# Altium PCB Relay PCB.PcbDoc
Units mil, origin at the board's own origin, x right, y up, seen from the top; angles counter-clockwise.
Board outline 5569.4 x 6338.61 mil, 4 copper layers (Top Layer, Signal Layer 1, Signal Layer 2, Bottom Layer), stack 30.635 mil thick; 27 components, 20 nets, 111 pads, 0 vias.
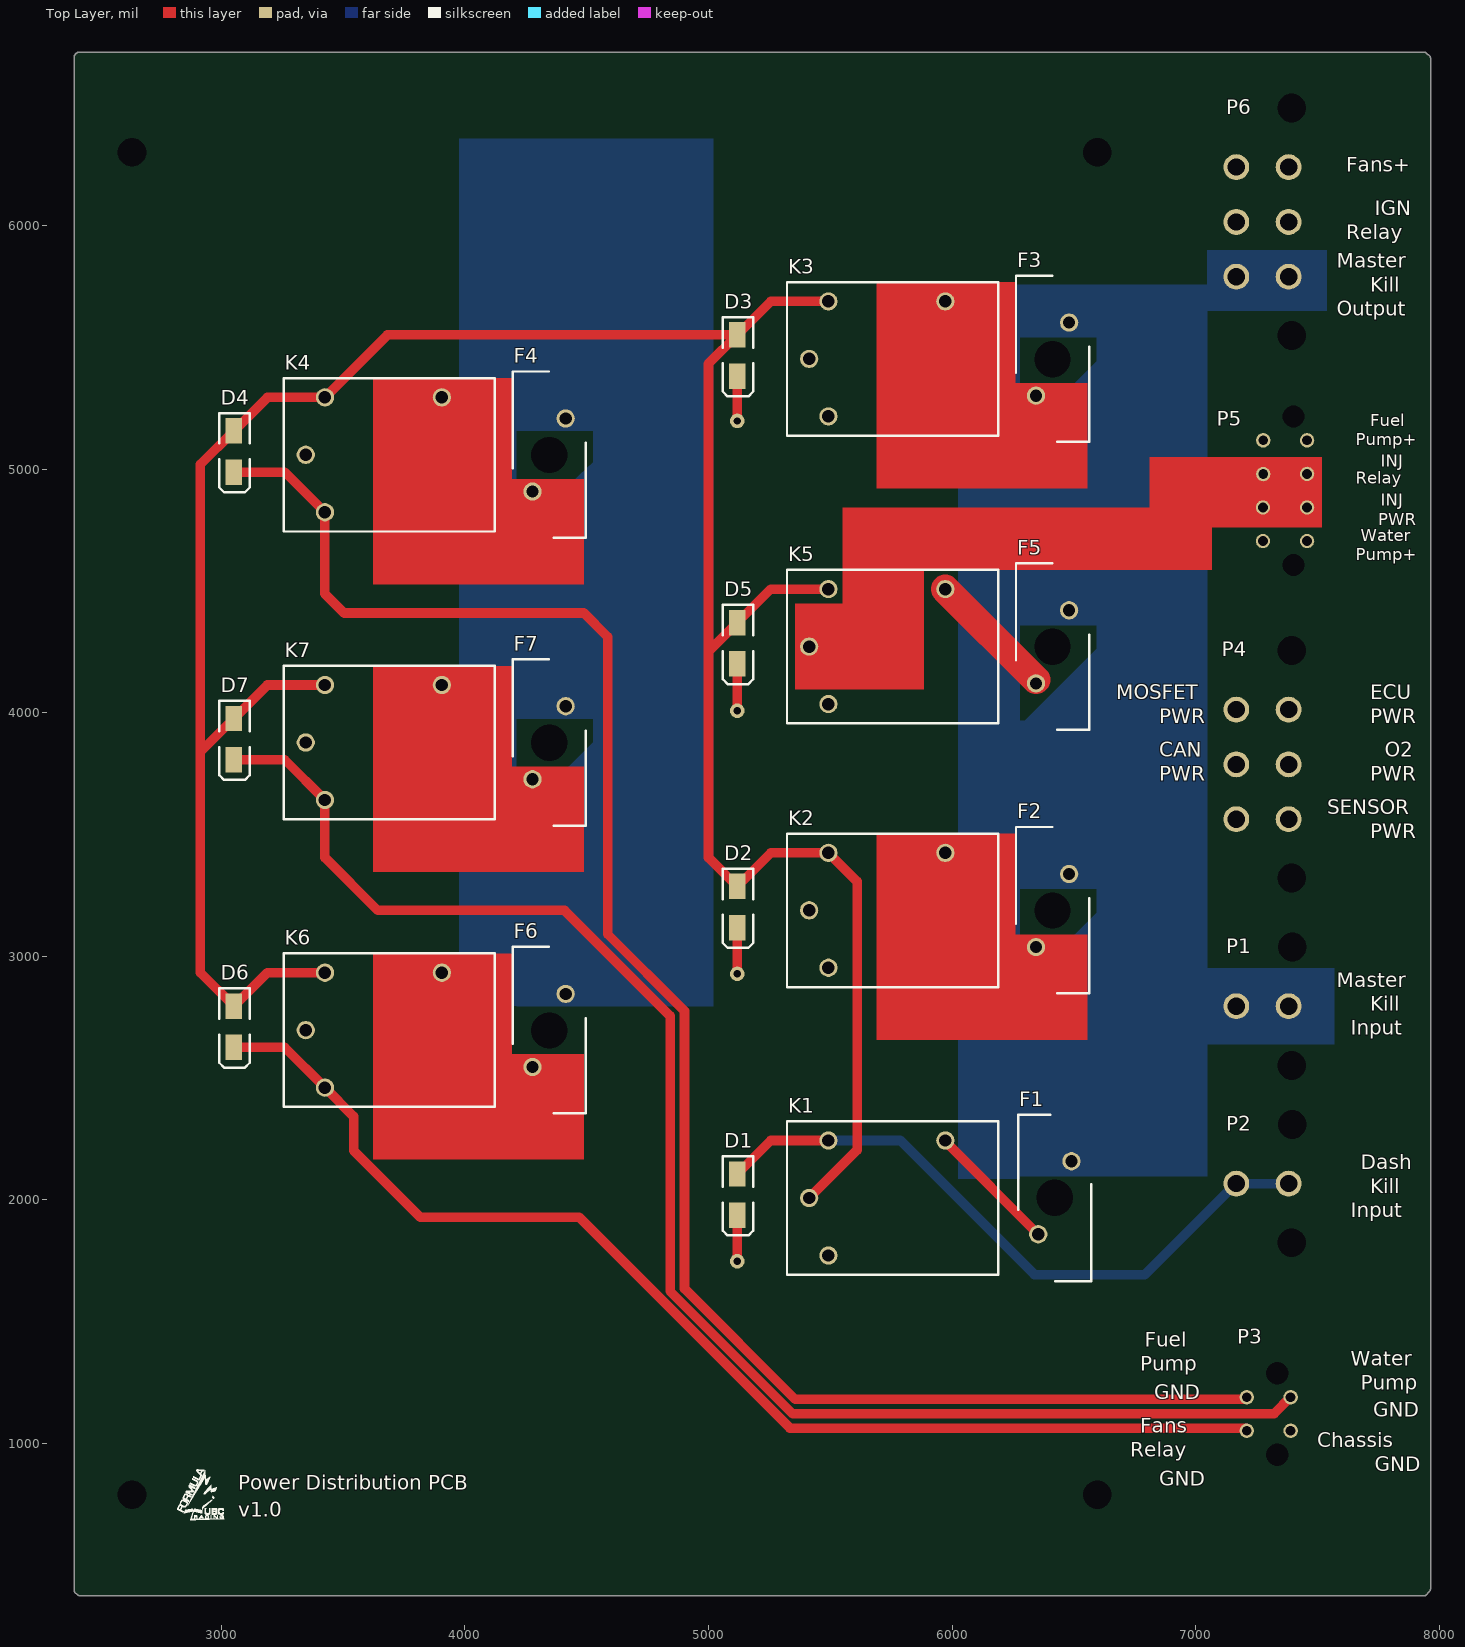
[diagram p0: Top Layer view]
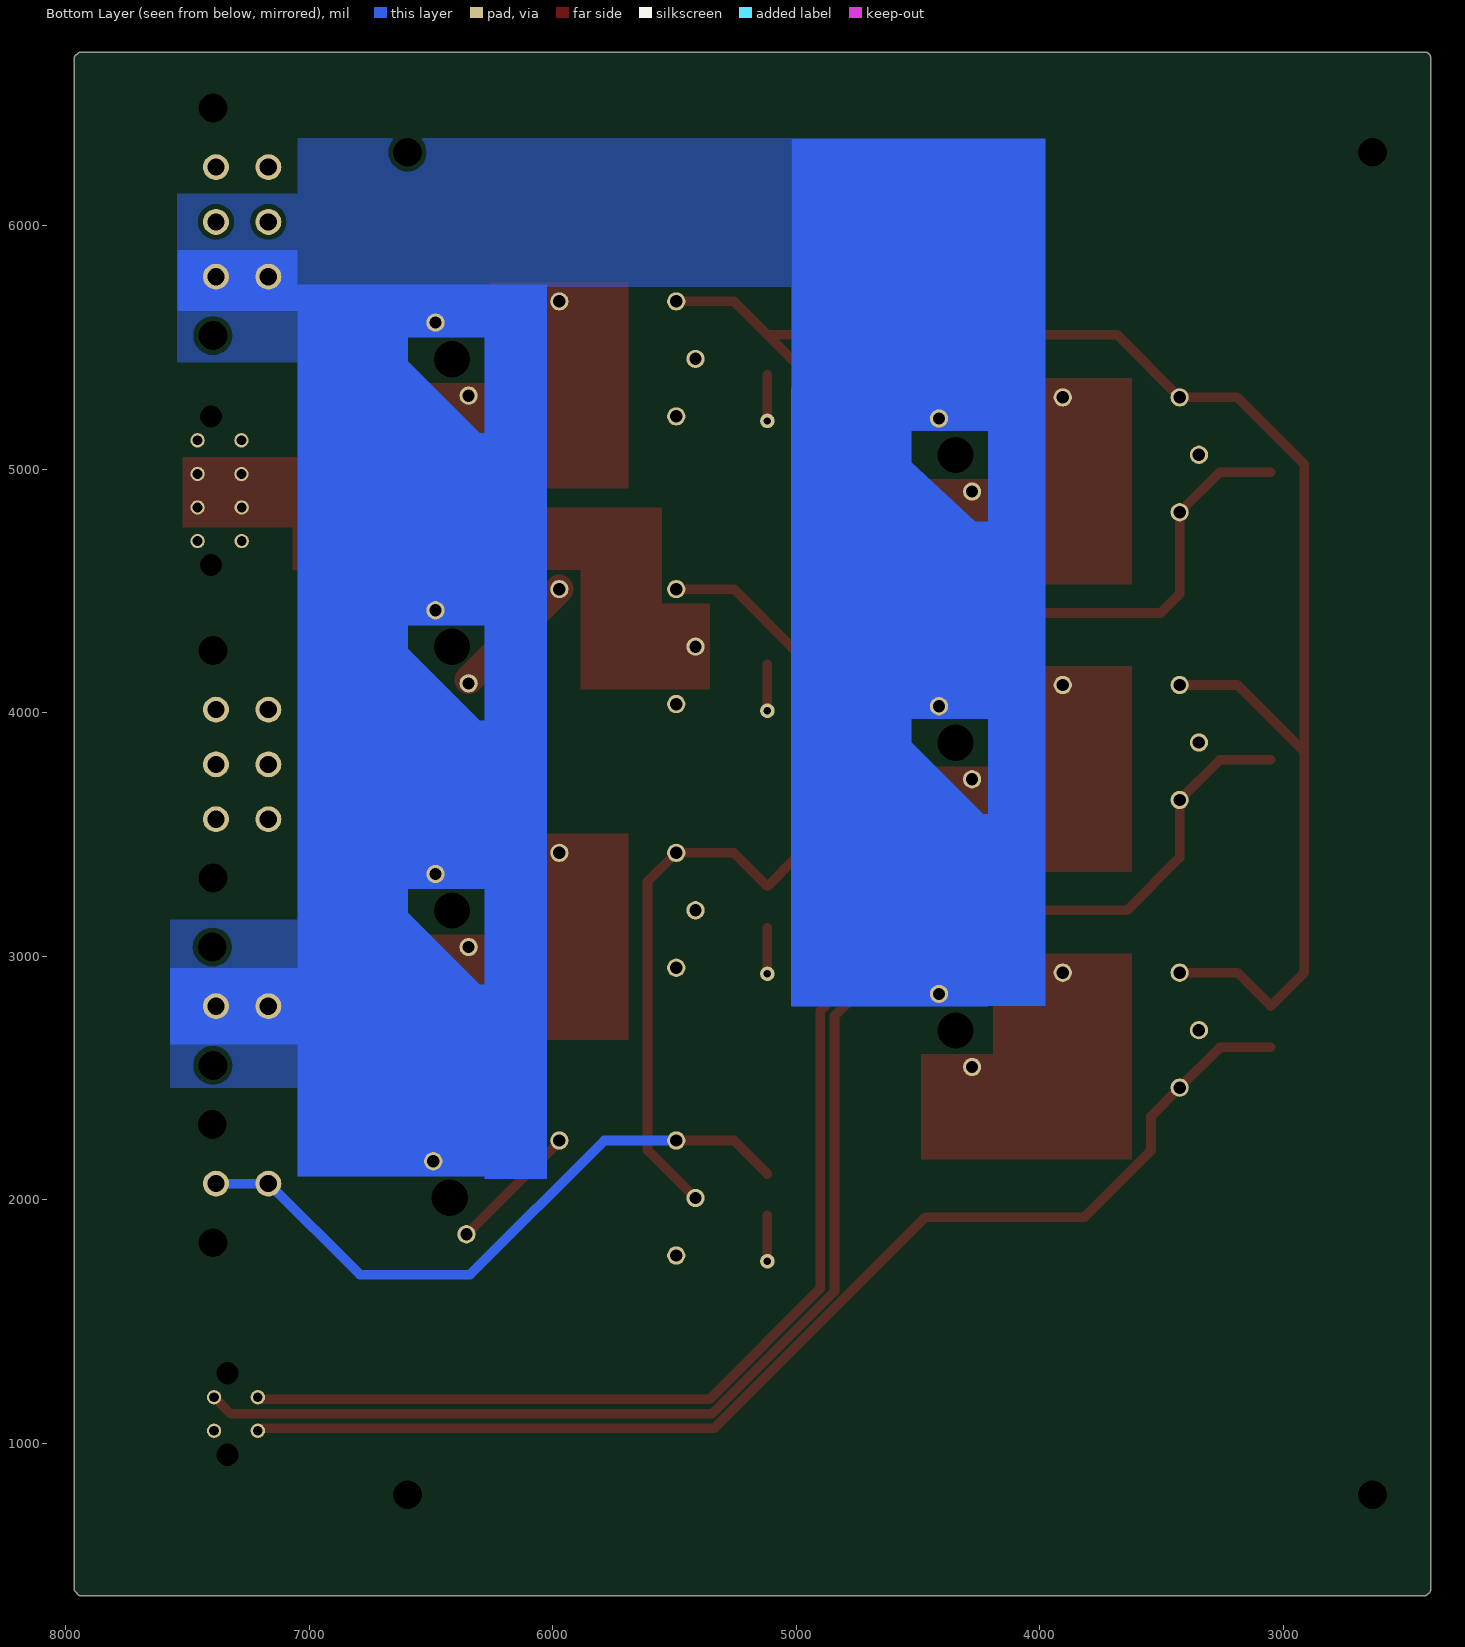
[diagram p1: Bottom Layer view, seen from below]
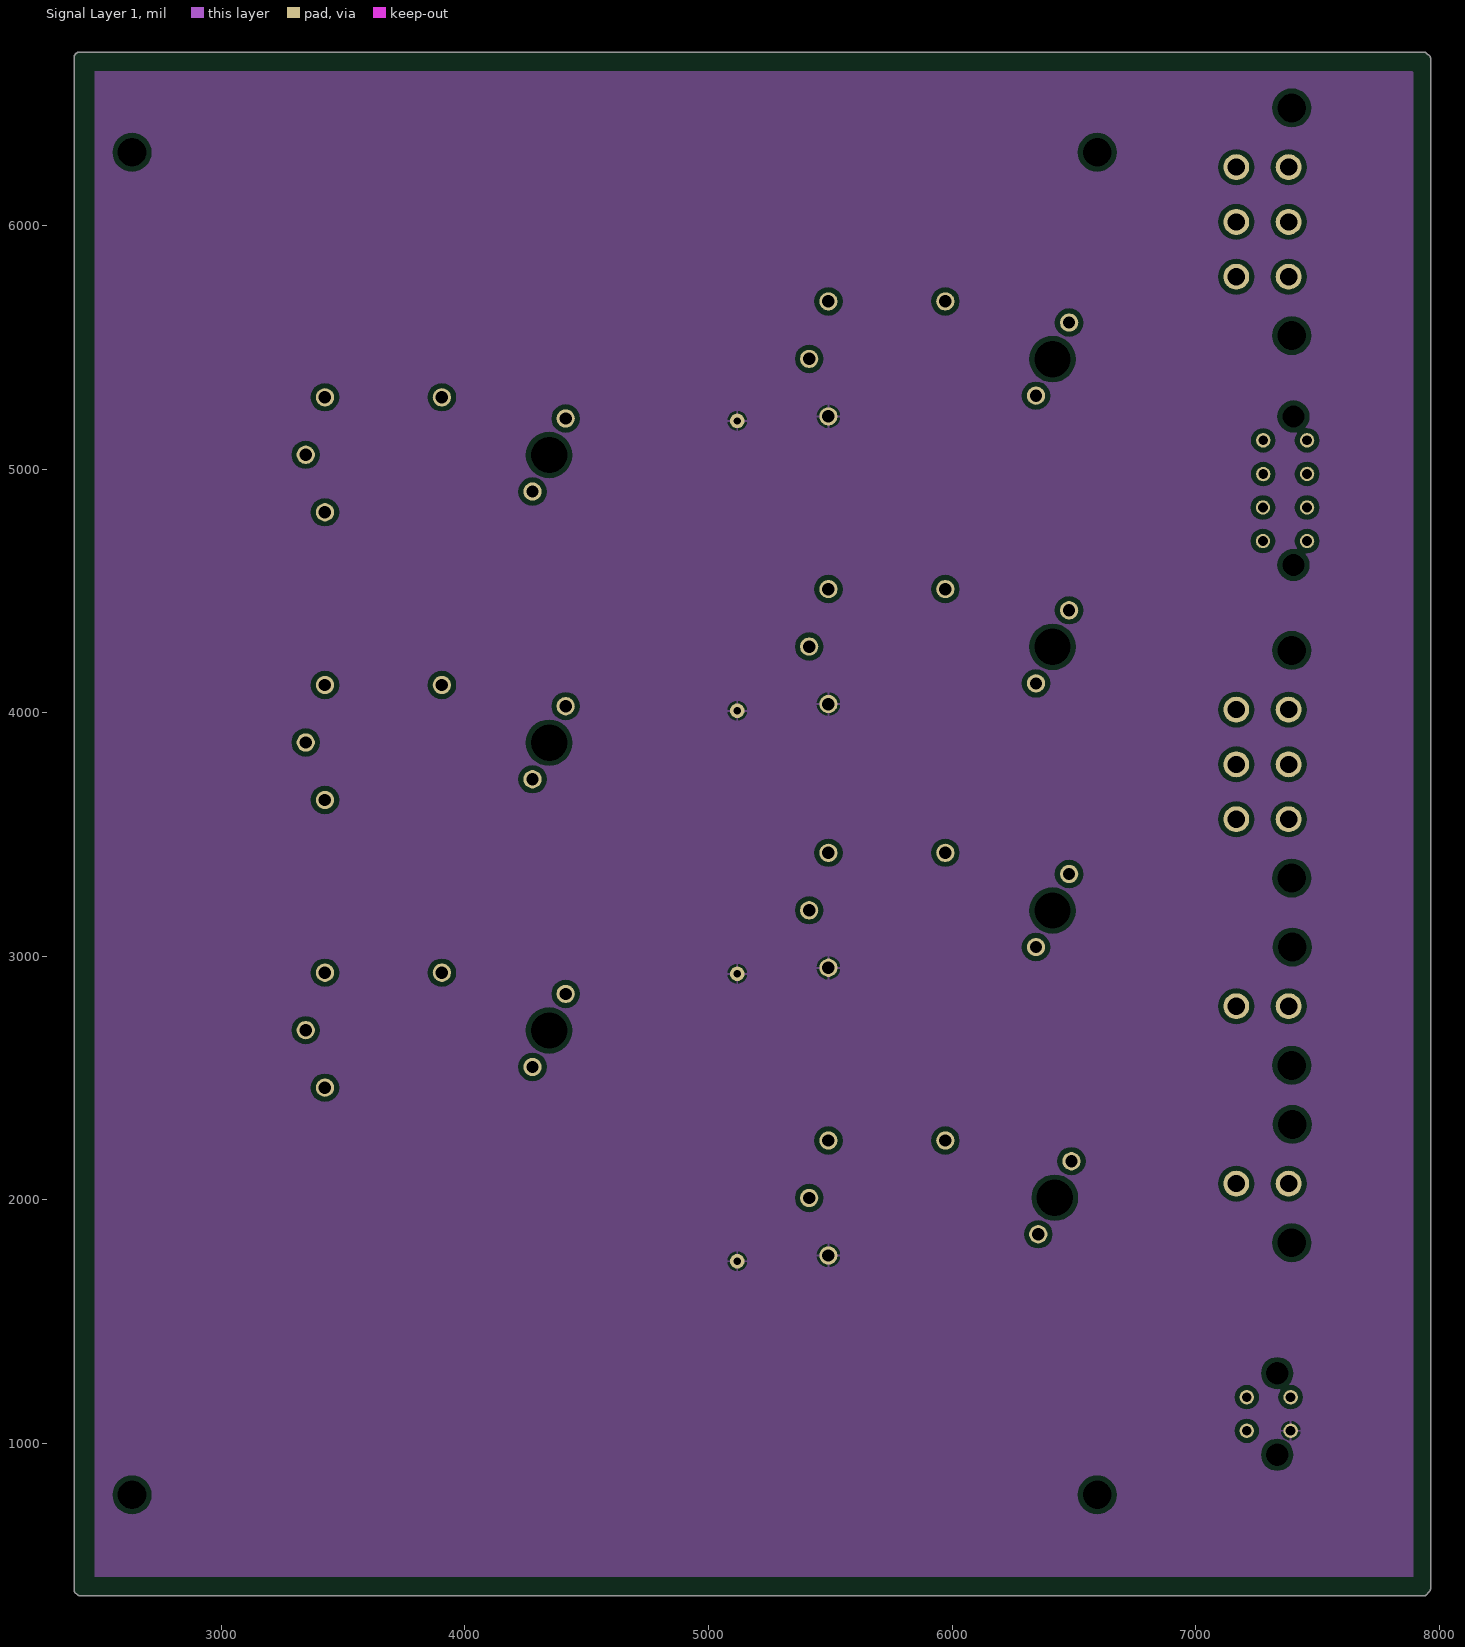
[diagram p2: Signal Layer 1]
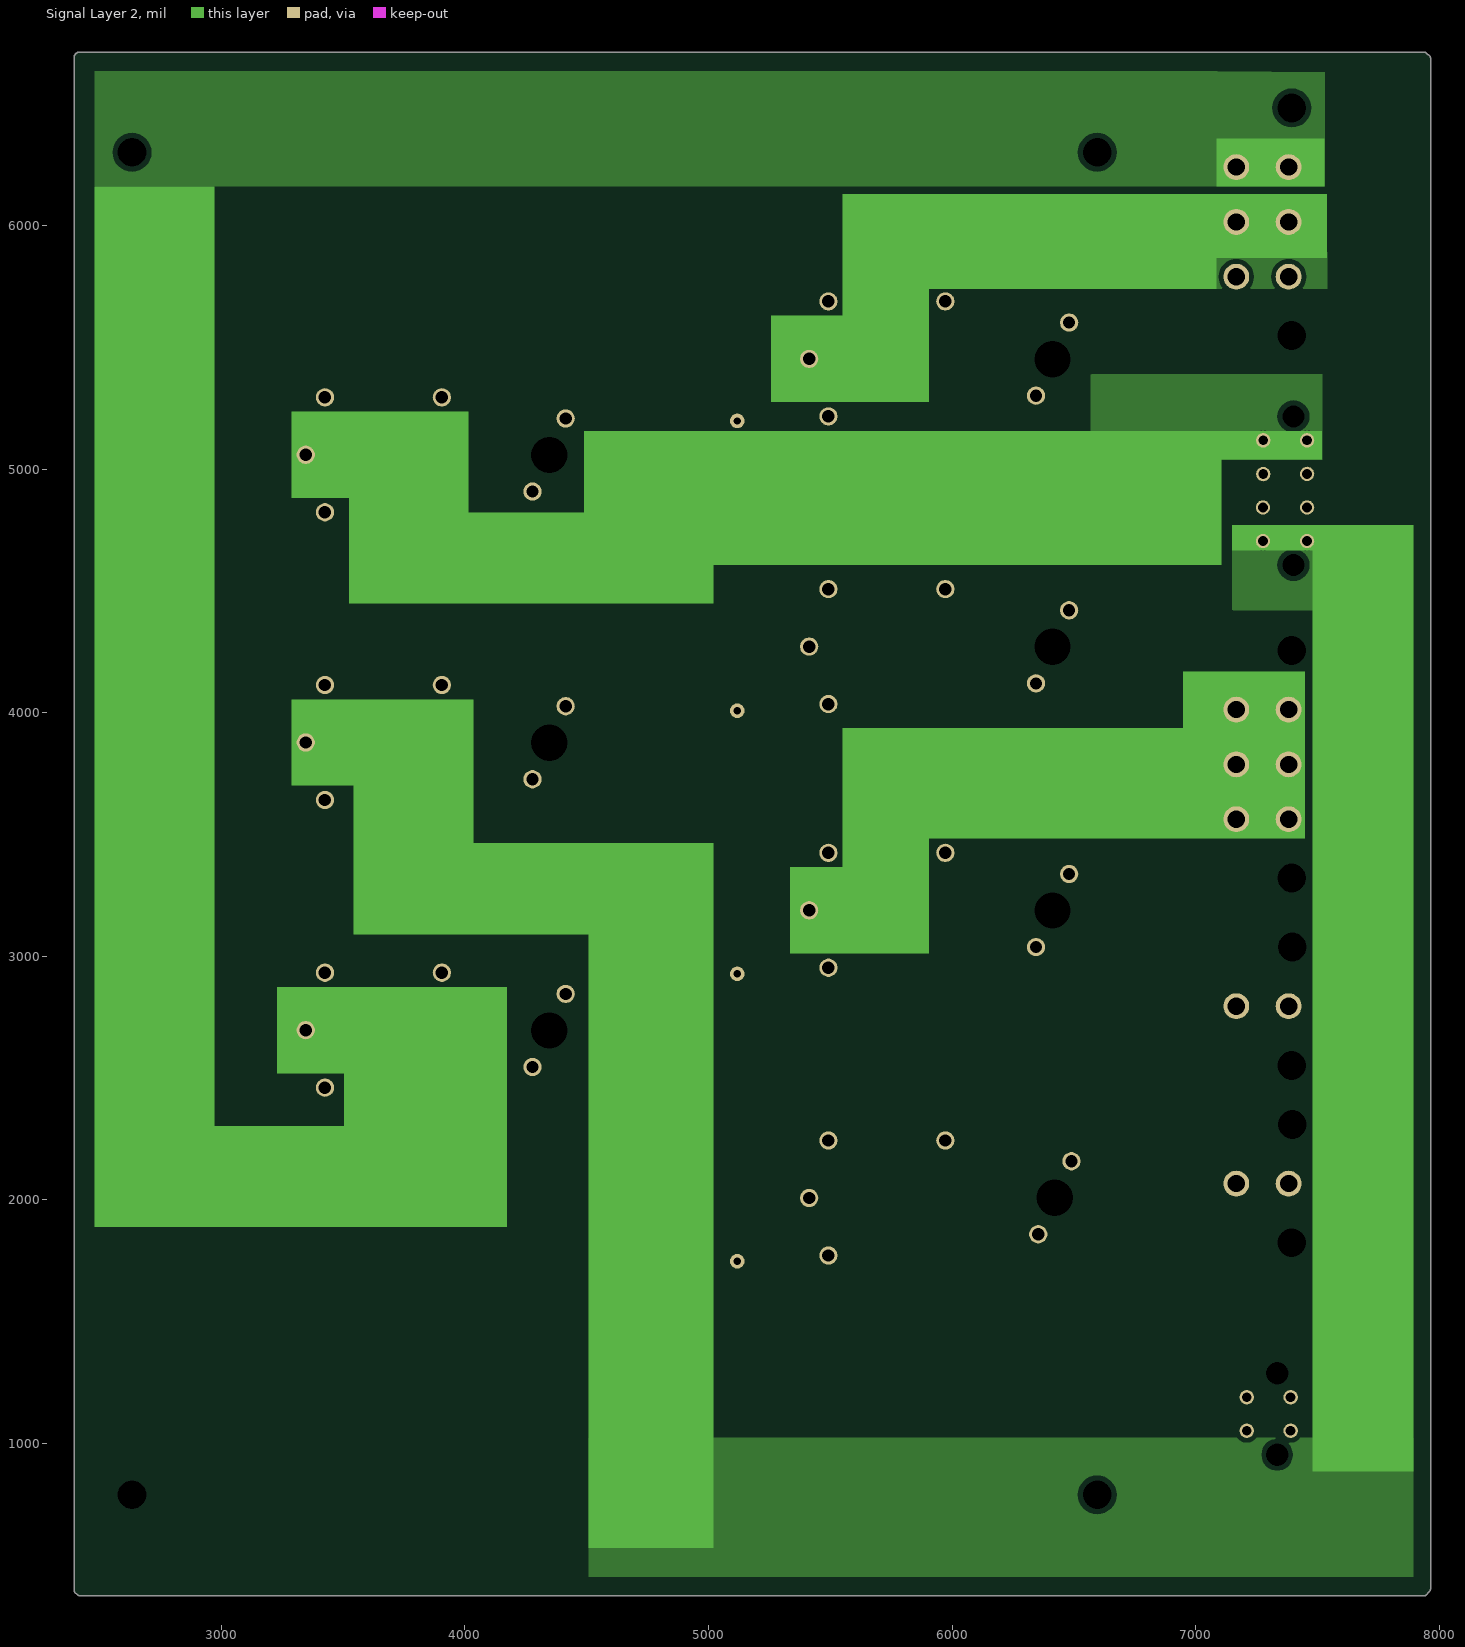
[diagram p3: Signal Layer 2]

## Layer stack, top to bottom
Top Solder: solder mask 0.4, Solder Resist, Dk 3.5
Top Layer: signal copper 1.4
Dielectric 1: core 10, FR-4, Dk 4.2
Signal Layer 1: signal copper 1.4173
Dielectric 3: prepreg 5, Dk 4.2
Signal Layer 2: signal copper 1.4173
Dielectric 2: core 10, Dk 4.2
Bottom Layer: signal copper 1.4
Bottom Solder: solder mask 0.4, Solder Resist, Dk 3.5

## Board outline
2395.3,400 2395.3,6690 cw(c2415,6690) 2402.6,6705.31 cw(c2417.91,6692.91) 2417.91,6712.61 7935,6712.61 cw(c7935,6692.91) 7951.57,6703.57 cw(c7945,6685) 7964.7,6685 7964.7,405 cw(c7945,405) 7953.63,387.29 cw(c7935,393.7) 7935,374 2423.19,374 cw(c2423.19,393.7) 2407.5,381.78 cw(c2415,400)

## Design rules (kind name [scope] priority, off if disabled: settings)
Clearance [All] p1: gap=10 except(20: Arc-Poly Track-Poly SMDPad-Poly THPad-Poly Via-Poly Fill-Poly Poly-Poly)
HoleSize [All] p1: absolutevalues=TRUE maxlimit=157.48 minlimit=1 maxpercent=80.000 minpercent=20.000
PolygonConnect [All] p1: connectstyle=Relief reliefconductorwidth=10 reliefentries=4 polygonreliefangle="90 Angle" airgapwidth=10
RoutingVias [All] p1: holewidth=28 width=50 viastyle="Through Hole" minholewidth=28 minwidth=50 maxholewidth=28 maxwidth=50
SolderMaskExpansion [All] p1: expansion=4
Width [All] p1: maxlimit=629.92 minlimit=39.37 preferedwidth=39.37
29 further rules are at their usual default settings.

## Components (designator, comment, footprint, x,y, rotation, side; value= is the part's Value field where it differs from the comment)
D1 "" S1GDIODE 5083.66,2054.13 r270 top
D2 "" S1GDIODE 5083.66,3235.24 r270 top
D3 "" S1GDIODE 5083.66,5499.02 r270 top
D4 "" S1GDIODE 3016.73,5105.31 r270 top
D5 "" S1GDIODE 5083.66,4317.91 r270 top
D6 "" S1GDIODE 3016.73,2743.11 r270 top
D7 "" S1GDIODE 3016.73,3924.21 r270 top
F1 "2A" FUSEHOLDERV2 6437.01,2007.87 r0 top
F2 "15A" FUSEHOLDERV2 6397.64,3188.98 r180 top
F3 "15A" FUSEHOLDERV2 6397.64,5452.76 r180 top
F4 "10A" FUSEHOLDERV2 4330.71,5059.06 r180 top
F5 "5A" FUSEHOLDERV2 6397.64,4271.65 r180 top
F6 "15A" FUSEHOLDERV2 4330.71,2696.85 r180 top
F7 "10A" FUSEHOLDERV2 4330.71,3877.95 r180 top
K1 "MAIN RELAY" SPSTRELAYV2 5586.39,2010.87 r0 top
K2 "" SPSTRELAYV2 5586.39,3191.98 r0 top
K3 "" SPSTRELAYV2 5586.39,5455.76 r0 top
K4 "" SPSTRELAYV2 3519.46,5062.06 r0 top
K5 "" SPSTRELAYV2 5586.39,4274.65 r0 top
K6 "" SPSTRELAYV2 3519.46,2699.85 r0 top
K7 "" SPSTRELAYV2 3519.46,3880.95 r0 top
P1 "Relay Input Connector 1" 2PINCONNECTORV1 7281.89,3385.28 r270 top
P2 "Relay Input Connector 2" 2PINCONNECTORV1 7281.89,2656.93 r270 top
P3 "Relay Input Connector 3" 4PINULTRA 7210,1052.2 r90 top
P4 "Relay Output Connector (Mega)" 6PINCONNECTORV1 7281.89,4602.99 r270 top
P5 "Relay Output Connector (Ultra)" 8PINULTRA 7457.48,4704.96 r90 top
P6 "Relay Output Connector (Mega)" 6PINCONNECTORV1 7281.89,6830.16 r270 top

## Footprints (in the part's own frame and the unit in brackets; to place one, negate y for a bottom-side part, rotate by r counter-clockwise, add the part's x,y. Pads: shape width x height; smd on the part's side, far side on the other; paste and mask are expansions set on the pad)
2PINCONNECTORV1 [mm]
  round 2.7 hole 1.8: 1(14.986,2.54) 2(14.986,-2.921)
  round 0 hole 3: ""(8.816,2.921) ""(21.156,2.865)
4PINULTRA [mm]
  round 1.5 hole 1.02: 1(3.5,-4.572) 2(3.5,0) 3(0,-4.572) 4(0,0)
  round 0 hole 2.3: ""(-2.5,-3.175) ""(6,-3.175)
6PINCONNECTORV1 [mm]
  round 2.7 hole 1.8: 1(14.986,2.54) 2(14.986,-2.921) 3(20.701,2.54) 4(20.701,-2.921) 5(26.416,2.54) 6(26.416,-2.921)
  round 0 hole 3: ""(8.816,2.865) ""(32.556,2.865)
8PINULTRA [mm]
  round 1.5 hole 1.02: 1(0,0) 2(0,4.6) 3(3.5,0) 4(3.5,4.6) 5(7,0) 6(6.985,4.572) 7(10.5,0) 8(10.5,4.572)
  round 0 hole 2.3: ""(-2.5,1.42) ""(12.994,1.42)
FUSEHOLDERV2 [mil]
  round 75 hole 50: 1(53,151) 2(-83,-149)
  round 0 hole 149.02: ""(-15,1)
  silkscreen extent -165,-342 135,341
S1GDIODE [mm] "Flyback diode"
  rect 2.65x1.75 smd: 1(2.975,0.875) 2(-1.325,0.875)
  silkscreen extent -3.18,-0.64 5.08,2.54
SPSTRELAYV2 [mil]
  round 75 hole 51: 1(-173,-3) 2(386,233) 3(-94,-239) 4(-94,233)
  silkscreen extent -264,-318 603,312

## Part data
D1 D2 D3 D4 D5 D6 D7: library part Diode, "Default Diode"
F1 F2 F3 F4 F5 F6 F7: library part "Fuse 2", "Fuse"
K1 K2 K3 K4 K5 K6 K7: library part Relay-SPST, "Single-Pole Single-Throw Relay"
P1 P2: library part "Header 2", "Header, 2-Pin"
P3: library part "Header 4", "Header, 4-Pin"
P4 P6: library part "Header 6", "Header, 6-Pin"
P5: library part "Header 8", "Header, 8-Pin"

## Free pads (board coordinates)
  round 60 hole 30: 2(5118.11,1748.11) 2(5118.11,2928.11) 2(5118.11,4008.11) 2(5118.11,5198.11)
  round 0 hole 118.11: ""(2633.39,789.13) ""(2633.39,6300.94) ""(6595.98,789.13) ""(6595.98,6300.94)

## Nets (pads, with @x,y where several pads share a name; then routed paths per layer and width w, separated by ;. In a path a pad name is that pad's centre, name@x,y a point inside that pad or via, vN(x,y) a via of type N, cw(c..) or ccw(c..) an arc to the next point about the centre after c; other vN are vias at no path point)
"CHASSIS GND": D1.1 D2.1 D3.1 D5.1 K1.3 K2.3 K3.3 K5.3 P3.3 pad.2 | length 758.9
  Top Layer w39.37: pad.2@5118.11,1748.11 D1.1 ; pad.2@5118.11,2928.11 D2.1 ; pad.2@5118.11,4008.11 D5.1@5118.11,4198.11 ; pad.2@5118.11,5198.11 D3.1 D3.1@5118.11,5388.11
NetD1_2: D1.2 K1.4 P2.1 P2.2 | length 2703.5
  Top Layer w39.37: D1.2 5255.69,2243.87 K1.4
  Bottom Layer w39.37: K1.4 5787.62,2243.87 6338.58,1692.91 6791.34,1692.91 P2.2@7166.12,2067.7 ; P2.2 P2.1
NetD2_2: D2.2 D3.2 D4.2 D5.2 D6.2 D7.2 K1.1 K2.4 K3.4 K4.4 K5.4 K6.4 K7.4 | length 11133.7
  Top Layer w39.37: K6.4 3188.76,2932.85 D6.2 2913.39,2933.07 2913.39,3838.58 ; K7.4 3188.76,4113.95 2913.39,3838.58 ; K1.1 5610.24,2204.72 5610.24,3307.13 K2.4 5255.69,3424.98 D2.2 5000,3405.51 5000,4251.97 ; K5.4 5255.69,4507.65 5000,4251.97 ; K3.4 5255.69,5688.76 D3.2 ; 2913.39,3838.58 2913.39,5019.69 D4.2 3188.76,5295.06 K4.4 3681.58,5551.18 D3.2 ; 5000,4251.97 5000,5433.07 D3.2
NetD4_1: D4.1 K4.3 P3.2 | length 7314.7
  Top Layer w39.37: D4.1 3260.32,4988.19 K4.3 3425.46,4487.93 3503.94,4409.45 4488.19,4409.45 4586.61,4311.02 4586.61,3090.55 4901.57,2775.59 4901.57,1635.7 5356.18,1181.1 P3.2@7210,1181.1
NetD6_1: D6.1 K6.3 P3.4 | length 4888.8
  Top Layer w39.37: D6.1 3260.32,2625.98 K6.3 3543.31,2343 3543.31,2202.11 3816.29,1929.13 4468.5,1929.13 5334.65,1062.99 P3.4@7210,1062.99
NetD7_1: D7.1 K7.3 P3.1 | length 6280
  Top Layer w39.37: D7.1 3260.32,3807.09 K7.3 3425.46,3405.77 3642.25,3188.98 4409.45,3188.98 4842.52,2755.91 4842.52,1624.94 5345.41,1122.05 7322.05,1122.05 P3.1
NetF1_1: F1.1 F2.2 F3.2 F4.2 F5.2 F6.2 F7.2 P1.1 P1.2 P6.5 P6.6
NetF1_2: F1.2 K1.2 | length 543.1
  Top Layer w39.37: K1.2 5972.39,2240.5 F1.2
NetF2_1: F2.1 K2.2
NetF3_1: F3.1 K3.2
NetF4_1: F4.1 K4.2
NetF5_1: F5.1 K5.2 | length 541.2
  Top Layer w39.37: F5.1 F5.1@6344.64,4135.4
  Top Layer w118.11: K5.2 F5.1@6344.64,4135.4
NetF6_1: F6.1 K6.2
NetF7_1: F7.1 K7.2
NetK2_1: K2.1 P4.1 P4.2 P4.3 P4.4 P4.5 P4.6
NetK3_1: K3.1 P6.3 P6.4
NetK4_1: K4.1 P5.7 P5.8
NetK5_1: K5.1 P5.3 P5.4 P5.5 P5.6
NetK6_1: K6.1 P6.1 P6.2
NetK7_1: K7.1 P5.1 P5.2
pads on no net: F1. F2. F3. F4. F5. F6. F7. P1. P2. P3. P4. P5. P6.

## Polygon pours and split planes (outlines as drawn)
"CHASSIS GND" on Signal Layer 1 "Bottom Layer-No Net" (solid, pour order 14): 2480.31,6633.86 7893.7,6633.86 7893.7,452.76 2480.32,452.76
NetK7_1 on Signal Layer 2 "K7_1" (solid, remove dead copper, pour order 19): 7150,4770 7480,4770 7480,4420 7150,4420
NetK4_1 on Signal Layer 2 "K4_1" (solid, remove dead copper, pour order 17): 6570,5390.3 6570,5039.37 7519.69,5039.37 7519.69,5389.31
NetK3_1 on Signal Layer 2 "K3_1" (solid, remove dead copper, pour order 13): 7060,5890 7540,5890 7540,5740 7060,5740
NetK6_1 on Signal Layer 2 "K6_1" (solid, remove dead copper, pour order 11): 7086.61,6633.86 7086.61,6161.42 7528.58,6161.42 7540,6150 7530,6160 7530,6630
NetK6_1 on Signal Layer 2 "K6_1" (solid, remove dead copper, pour order 16): 2480.32,6633.86 2480.32,6161.42 4780,6161.42 7086.61,6161.42 7086.61,6633.86
NetK7_1 on Signal Layer 2 "K7_1" (solid, remove dead copper, pour order 12): 4507.87,1023.62 7893.7,1023.62 7893.7,452.76 4507.87,452.76
NetF1_1 on Bottom Layer "F1_1" (solid, remove dead copper, pour order 20): 7030,3150 7570,3150 7570,2460 7030,2460
NetF1_1 on Bottom Layer "F1_1" (solid, remove dead copper, pour order 15): 7040,6130 7540,6130 7540,5440 7040,5440
NetF1_1 on Bottom Layer "F1_1" (solid, pour order 18): 7047.24,5748.03 5019.69,5748.03 5019.69,6358.27 7047.24,6358.27 7047.24,5757.87

## Other copper
Top Layer:
  rectangle net NetK5_1: 7145.67,4760 7519.69,5050
  rectangle net NetK5_1: 6811.02,4760 7145.67,5050
  rectangle net NetK5_1: 5551.18,4586.61 7066.93,4842.52
  rectangle net NetK5_1: 5551.18,4429.13 5885.83,4803.15
  rectangle net NetK5_1: 5354.33,4094.49 5885.83,4448.82
  rectangle net NetF2_1: 5688.98,2874.02 6259.84,3503.94
  rectangle net NetF3_1: 5688.98,5137.8 6259.84,5767.72
  rectangle net NetF6_1: 3622.05,2381.89 4192.91,3011.81
  rectangle net NetF3_1: 5688.98,4921.26 6555.12,5354.33
  rectangle net NetF2_1: 5688.98,2657.48 6555.12,3090.55
  rectangle net NetF6_1: 3622.05,2165.35 4488.19,2598.43
  rectangle net NetF7_1: 3622.05,3346.46 4488.19,3779.53
  rectangle net NetF7_1: 3622.05,3562.99 4192.91,4192.91
  rectangle net NetF4_1: 3622.05,4527.56 4488.19,4960.63
  rectangle net NetF4_1: 3622.05,4744.09 4192.91,5374.02
Signal Layer 2:
  rectangle net NetK6_1: 7086.61,6161.42 7528.58,6357.12
  rectangle net NetK3_1: 5551.18,5740 7086.61,6110
  rectangle net NetK2_1: 5334.65,3011.81 5905.51,3366.14
  rectangle net NetK2_1: 6948.82,3937.01 7450,4170
  rectangle net NetK7_1: 4507.87,570.87 5019.69,3464.57
  rectangle net NetK7_1: 3543.31,3090.55 4960.63,3464.57
  rectangle net NetK7_1: 3543.31,3090.55 4035.43,4055.12
  rectangle net NetK7_1: 3287.4,3700.79 4035.43,4055.12
  rectangle net NetK7_1: 7480.31,885.83 7893.7,4704.72
  rectangle net NetK7_1: 7150,4665.35 7893.7,4770
  rectangle net NetK4_1: 6791.34,4803.15 7100,5157.48
  rectangle net NetK4_1: 3523.62,4783.46 4015.75,5236.22
  rectangle net NetK4_1: 3287.4,4881.89 4015.75,5236.22
  rectangle net NetK4_1: 3523.62,4448.82 5019.69,4822.83
  rectangle net NetK4_1: 4488.19,4606.3 7106.3,5157.48
  rectangle net NetK4_1: 4488.19,4448.82 4901.57,5098.43
  rectangle net NetK4_1: 4488.19,5039.37 7519.69,5157.48
  rectangle net NetK6_1: 2480.32,1929.13 2972.44,6161.42
  rectangle net NetK6_1: 2480.32,1889.76 4173.23,2303.15
  rectangle net NetK6_1: 3503.94,1929.13 4173.23,2874.02
  rectangle net NetK6_1: 3228.35,2519.69 3858.27,2874.02
  rectangle net NetK3_1: 5551.18,5866.14 7539.37,6130
  rectangle net NetK3_1: 5551.18,5275.59 5905.51,6102.36
  rectangle net NetK3_1: 5255.91,5275.59 5905.51,5629.92
  rectangle net NetK2_1: 5551.18,3484.25 7450,3937.01
  rectangle net NetK2_1: 5551.18,3169.29 5905.51,3740.16
Bottom Layer:
  rectangle net NetF1_1: 7047.24,5649.61 7539.37,5900
  rectangle net NetF1_1: 3976.38,5334.65 5019.69,6358.27
  rectangle net NetF1_1: 3976.38,2795.28 4212.6,5354.33
  rectangle net NetF1_1: 7047.24,2637.8 7570,2952.76
  rectangle net NetF1_1: 6023.62,2086.61 6279.53,5757.87
  region net NetF1_1: 4212.6,5354.33 5000,5354.33 5019.69,5334.65 5019.69,2795.28 4212.6,2795.28 4212.6,3582.68 4232.28,3582.68 4527.56,3877.95 4527.56,3976.38 4212.6,3976.38 4212.6,4783.46 4264.62,4783.46 4527.56,5028.87 4527.56,5157.48 4212.6,5157.48
  region net NetF1_1: 6279.53,5757.87 7047.24,5757.87 7047.24,2096.46 6279.53,2096.46 6279.53,2883.86 6299.21,2883.86 6594.49,3179.13 6594.49,3277.56 6279.53,3277.56 6279.53,3966.54 6299.21,3966.54 6594.49,4261.81 6594.49,4360.24 6279.53,4360.24 6279.53,5147.64 6299.21,5147.64 6594.49,5442.91 6594.49,5541.34 6279.53,5541.34 6279.53,5757.87

## Silkscreen, mask and mechanical layers (free items; w line width, h text height)
Top Overlay:
  drawing of 4510 lines, arcs and shapes, not listed
  text "Fans+" at 7618.11,6220.47 h60
  text "IGN" at 7736.22,6043.31 h60
  text "Relay" at 7618.11,5944.88 h60
  text "Master" at 7578.74,5826.77 h60
  text "Kill" at 7716.54,5728.35 h60
  text "Output" at 7578.74,5629.92 h60
  text "Fuel" at 7716.54,5177.17 h50
  text "Pump+" at 7657.48,5098.43 h50
  text "INJ" at 7760,5010 h50
  text "Relay" at 7657.48,4940.94 h50
  text "INJ" at 7760,4850 h50
  text "PWR" at 7750,4770 h50
  text "Water" at 7677.17,4704.72 h50
  text "Pump+" at 7657.48,4625.98 h50
  text "MOSFET" at 6673.23,4055.12 h60
  text "ECU" at 7716.54,4055.12 h60
  text "PWR" at 6850.39,3956.69 h60
  text "PWR" at 7716.54,3956.69 h60
  text "CAN" at 6850.39,3818.9 h60
  text "O2" at 7775.59,3818.9 h60
  text "PWR" at 6850.39,3720.47 h60
  text "PWR" at 7716.54,3720.47 h60
  text "SENSOR" at 7539.37,3582.68 h60
  text "PWR" at 7716.54,3484.25 h60
  text "Master" at 7578.74,2874.02 h60
  text "Kill" at 7716.54,2775.59 h60
  text "Input" at 7637.8,2677.17 h60
  text "Dash" at 7677.17,2125.98 h60
  text "Kill" at 7716.54,2027.56 h60
  text "Input" at 7637.8,1929.13 h60
  text "Fuel" at 6791.34,1397.64 h60
  text "Water" at 7637.8,1318.9 h60
  text "Pump" at 6771.65,1299.21 h60
  text "Pump" at 7677.17,1220.47 h60
  text "GND" at 6830.71,1181.1 h60
  text "GND" at 7730,1110 h60
  text "Fans" at 6771.65,1043.31 h60
  text "Chassis" at 7500,984.25 h60
  text "Relay" at 6732.28,944.88 h60
  text "GND" at 7736.22,885.83 h60
  text "GND" at 6850.39,826.77 h60
  text "Power Distribution PCB" at 3070,810 h60
  text "v1.0" at 3070,700 h60
Mechanical 1:
  lines w39.37: 2415,400 2415,6690 ; 2417.91,6692.91 7935,6692.91 ; 2423.19,393.7 7935,393.7 ; 7945,405 7945,6685